# EAGLE board power_12V (EAGLE 9.3.2)
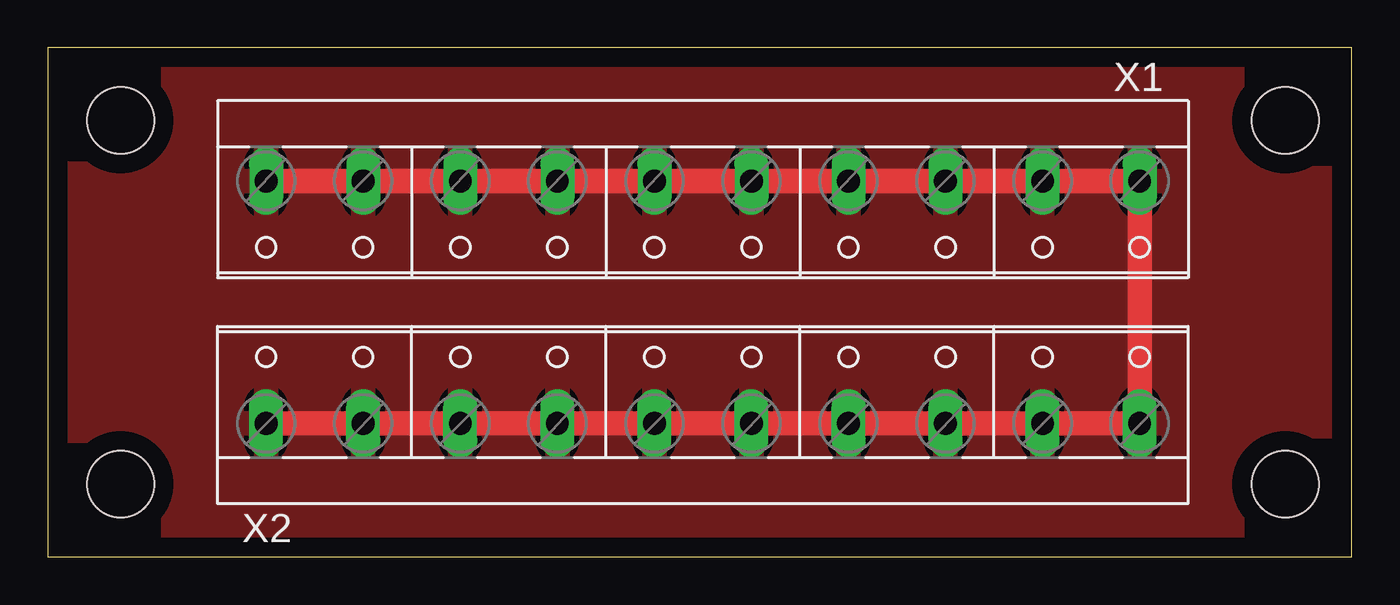
[diagram p0: board, top side]
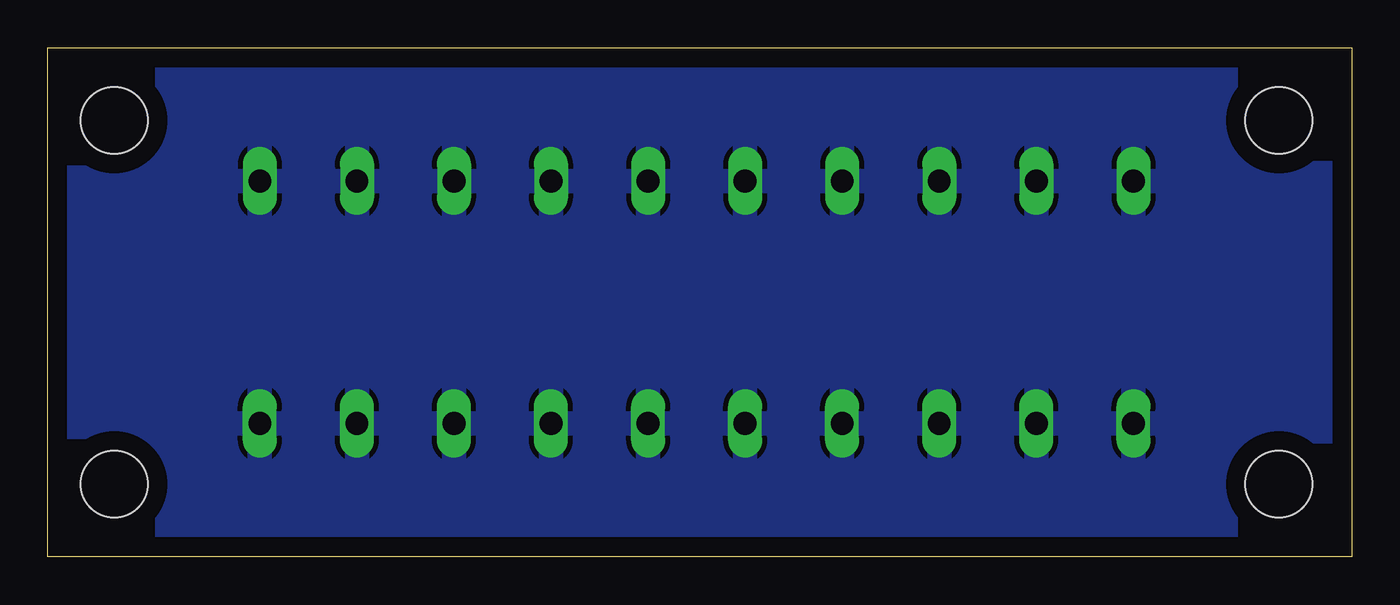
[diagram p1: board, bottom side, seen from below]

Size 68.25 x 26.66 mm. Coordinates in mm from the lower left corner, seen from the top.
Outline: 0,0 68.25,0 68.25,26.66 0,26.66 0,0
Copper layers (1*16): Top 0.035mm / dielectric 1.5mm / Bottom 0.035mm
Design rules "default": minimum track width 6mil, minimum drill 0.35mm, track to track 6mil, track to pad 6mil, pad to pad 6mil, via to via 6mil, smd to smd 6mil, copper to edge 40mil, drill to drill 6mil, minimum pad ring 10mil, minimum via ring 8mil, stop-mask expansion 4mil, vias tented up to drill 0mil, thermal gap 10mil
Holes 3.5 mm at 3.81,22.86 3.81,3.81 64.77,22.86 64.77,3.81

## Footprints (pad centres in the part's own frame; a part is rotated, then mirrored left to right if it is on the bottom)
W237-10P = drill 1.194 long: 1 -22.86,-0.635; 2 -17.78,-0.635; 3 -12.7,-0.635; 4 -7.62,-0.635; 5 -2.54,-0.635; 6 2.54,-0.635; 7 7.62,-0.635; 8 12.7,-0.635; 9 17.78,-0.635; 10 22.86,-0.635

## Placement (x,y rotation side)
X1  [W237-10P]  34.29,19.05 180 top
X2  [W237-10P]  34.29,7.62 0 top

## Library data of the parts
X1 X2 = con-wago-508; OC_FARNELL: unknown; OC_NEWARK: unknown

## Nets
VCC: X1.1 X1.2 X1.3 X1.4 X1.5 X1.6 X1.7 X1.8 X1.9 X1.10 X2.1 X2.2 X2.3 X2.4 X2.5 X2.6 X2.7 X2.8 X2.9 X2.10

## Tracks (layer width: path | path; a pad name or v marks a point on that pad's centre or on a via)
VCC
  Top 1.27: X1.10 X1.9 X1.8 X1.7 X1.6 X1.5 X1.4 X1.3 X1.2 X1.1 X2.10 X2.9 X2.8 X2.7 X2.6 X2.5 X2.4 X2.3 X2.2 X2.1
  pour Top: 0,26.67 68.58,26.67 68.58,0 0,0
  pour Bottom: 0,26.67 68.58,26.67 68.58,0 0,0

## Text on the board
tValues: 12V | 12V